# Altium PCB Frontend.PcbDoc
Units mm, origin at the board's own origin, x right, y up, seen from the top; angles counter-clockwise.
Board outline 50 x 80 mm, 4 copper layers (Top Layer, Mid Layer 1, Mid Layer 2, Bottom Layer), stack 1.57 mm thick; 81 components, 52 nets, 250 pads, 306 vias.
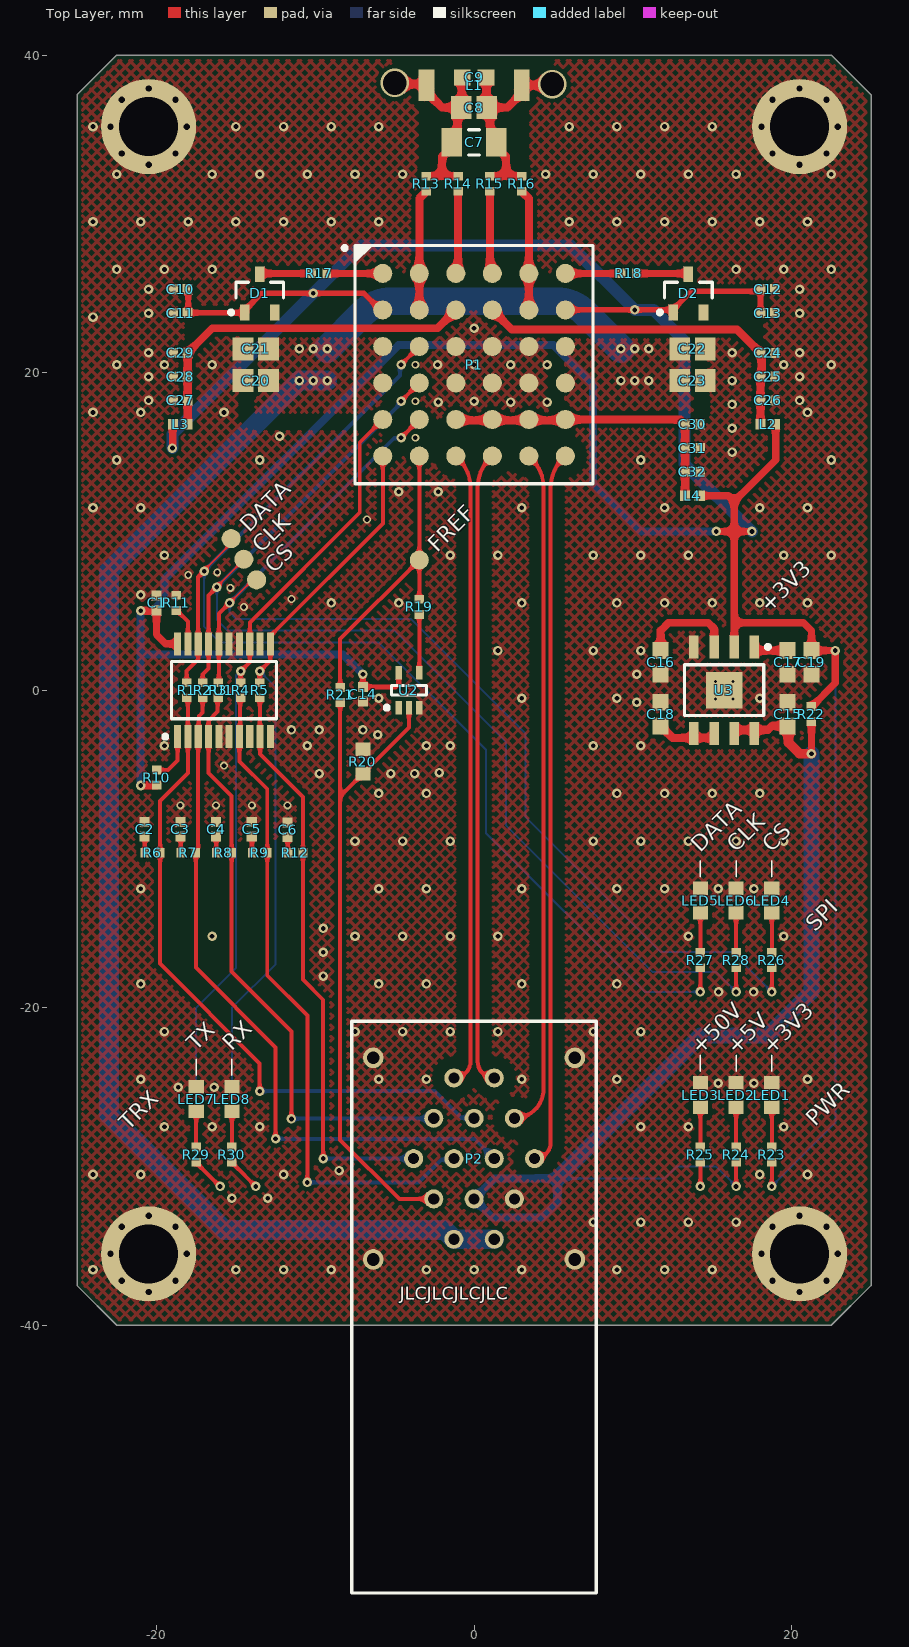
[diagram p0: Top Layer view]
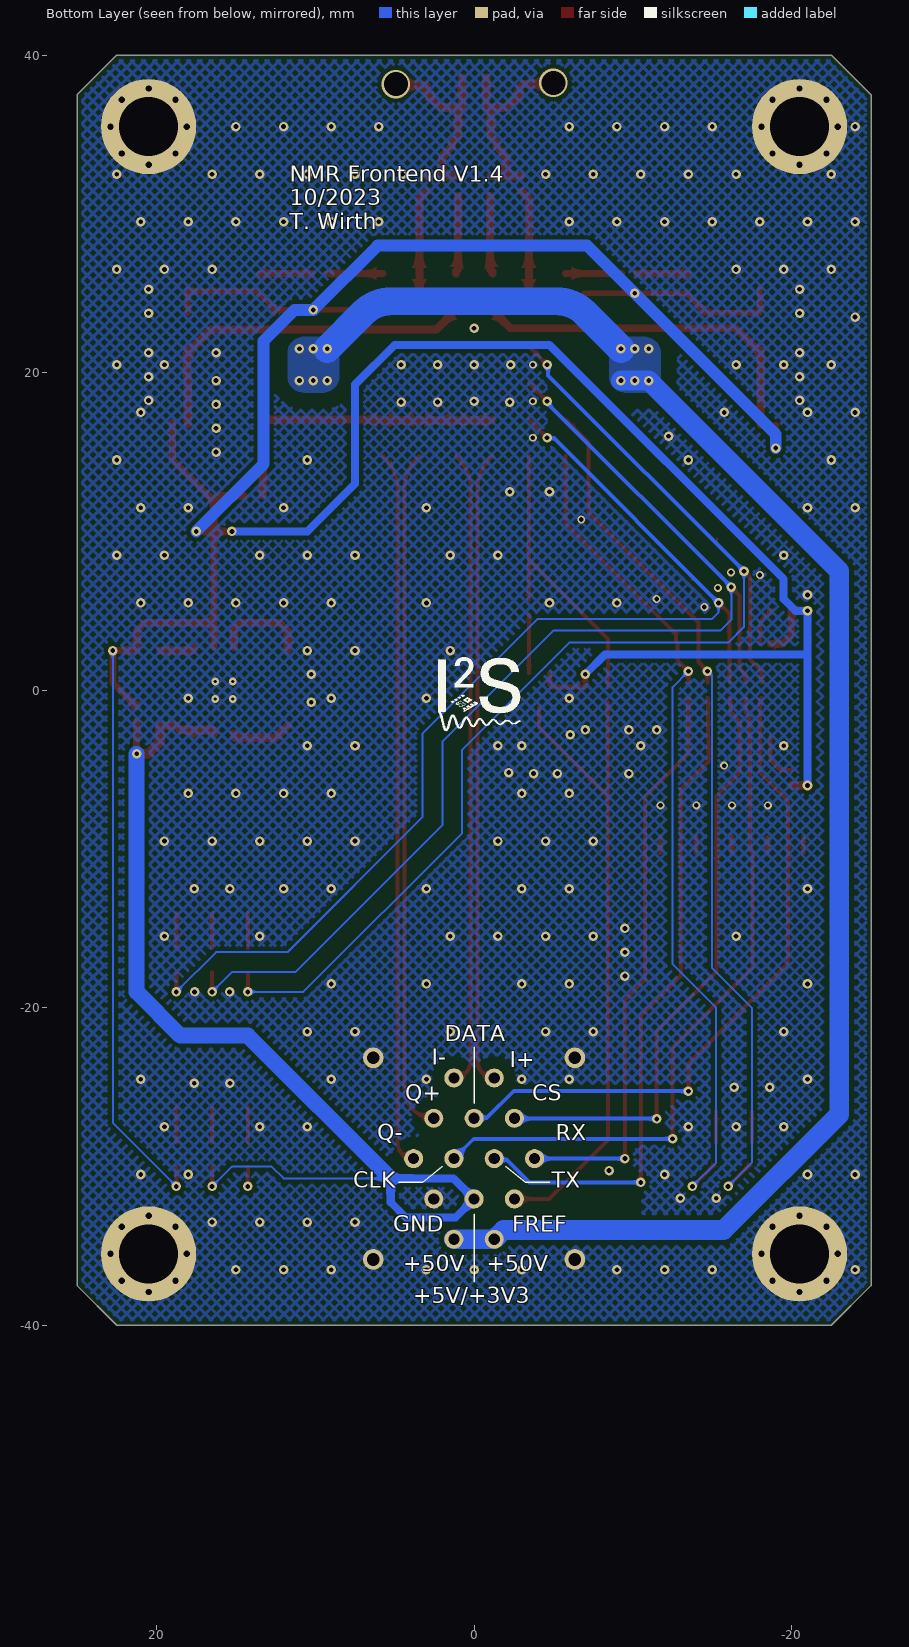
[diagram p1: Bottom Layer view, seen from below]
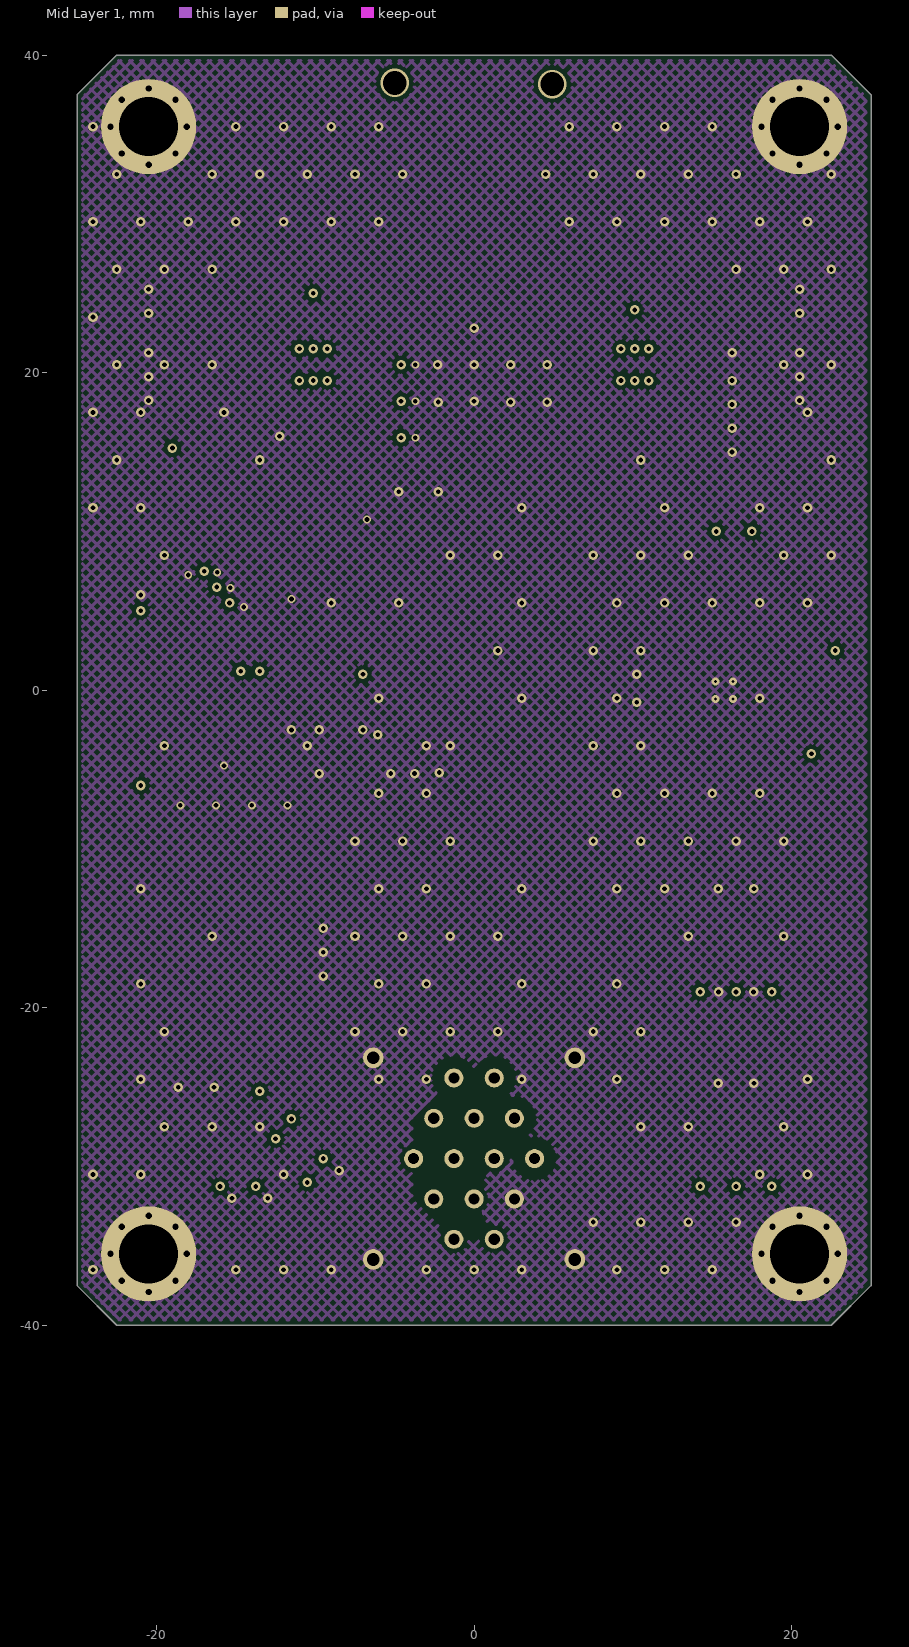
[diagram p2: Mid Layer 1]
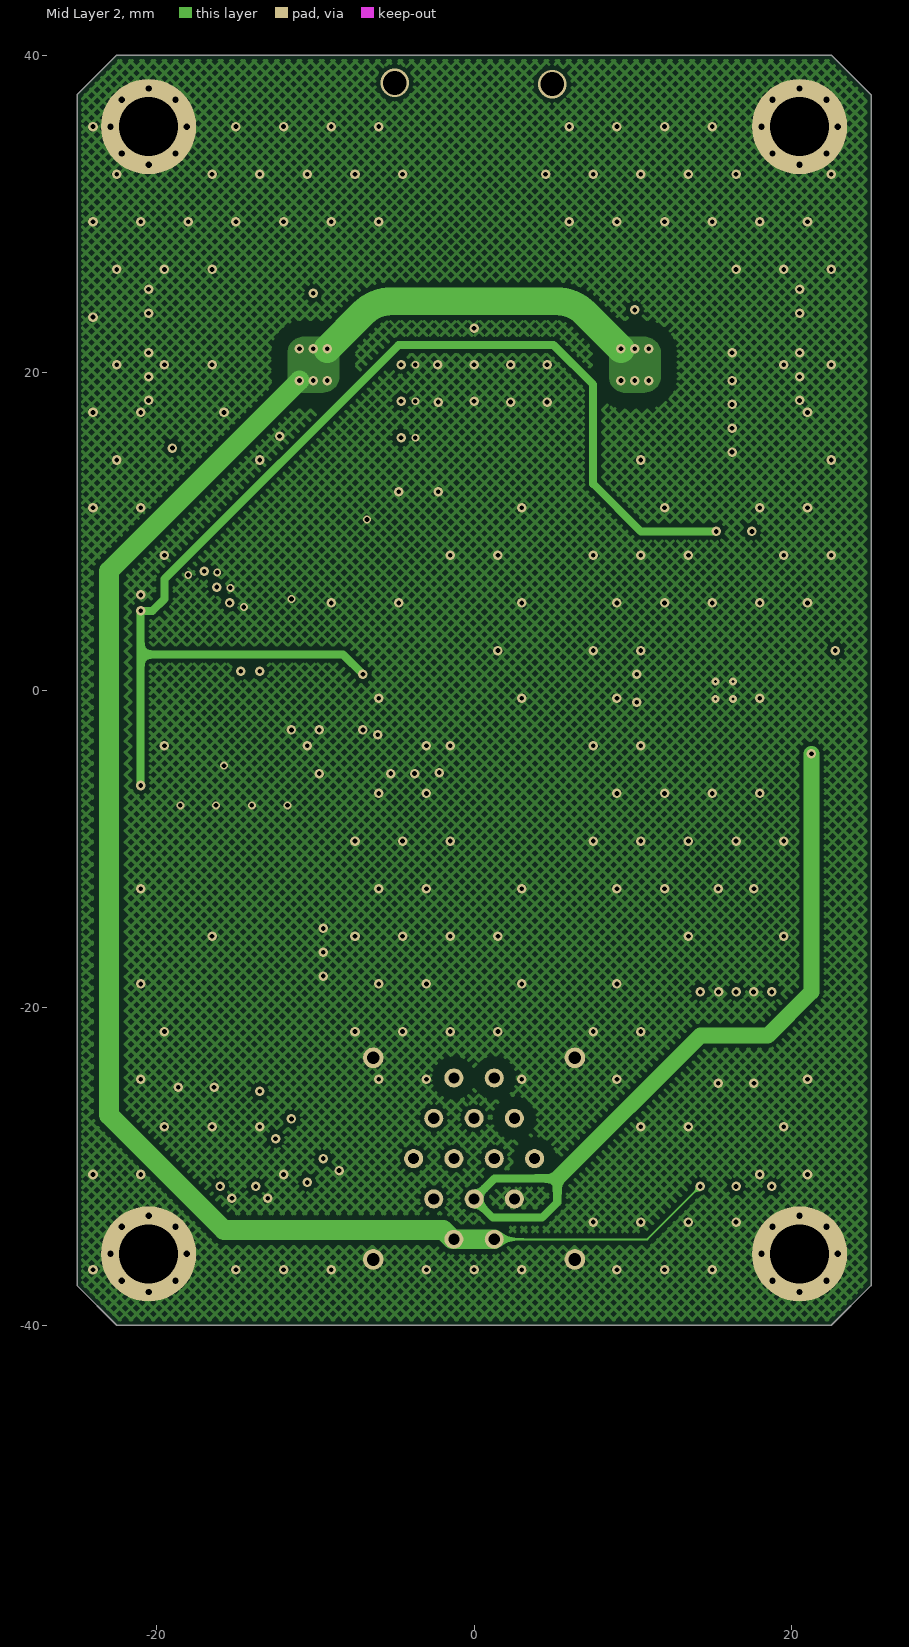
[diagram p3: Mid Layer 2]

## Layer stack, top to bottom
Top Solder: solder mask 0.0127, Solder Resist, Dk 3.8
Top Layer: signal copper 0.035
Dielectric 1: prepreg 0.1, 2313, Dk 4.05
Mid Layer 1: signal copper 0.0175
Core: core 1.265, FR-4, Dk 4.5
Mid Layer 2: signal copper 0.0175
Dielectric 2: prepreg 0.1, 2313, Dk 4.05
Bottom Layer: signal copper 0.035
Bottom Solder: solder mask 0.0127, Solder Resist, Dk 3.8

## Board outline
-25,-37.5 -22.5,-40 22.5,-40 25,-37.5 25,37.5 22.5,40 -22.5,40 -25,37.5

## Design rules (kind name [scope] priority, off if disabled: settings)
BoardOutlineClearance [All] p1: gap=0.2 ignorepadtopadclearanceinfootprint=FALSE
Clearance Clearance_IQ [InNetClass('IQ')] p1: gap=0.102 ignorepadtopadclearanceinfootprint=FALSE except(0.09: Arc-Arc Arc-Track Track-Track; 0.127: SMDPad-SMDPad THPad-Via Via-Fill Via-Region Via-Text; 0.2: Arc-SMDPad Track-SMDPad; 0.254: Arc-Via Arc-Hole Track-Via Track-Hole SMDPad-Via SMDPad-Hole THPad-Hole Via-Via Via-Hole Fill-Hole Poly-Hole Region-Hole Text-Hole; 0.33: Arc-THPad Track-THPad SMDPad-THPad THPad-THPad; 0.75: Arc-Poly Track-Poly SMDPad-Poly THPad-Poly Via-Poly Fill-Poly Poly-Poly)
Clearance Clearance_PWR [InNet('+50V')] p2: gap=0.102 ignorepadtopadclearanceinfootprint=FALSE except(0.09: Arc-Arc Arc-Track Track-Track; 0.127: SMDPad-SMDPad THPad-Via Via-Fill Via-Region Via-Text; 0.2: Arc-SMDPad Track-SMDPad; 0.25: SMDPad-Poly THPad-Poly Via-Poly; 0.254: Arc-Via Arc-Hole Track-Via Track-Hole SMDPad-Via SMDPad-Hole THPad-Hole Via-Via Via-Hole Fill-Hole Poly-Hole Region-Hole Text-Hole; 0.3: Arc-Poly Track-Poly; 0.33: Arc-THPad Track-THPad SMDPad-THPad THPad-THPad; 1: Fill-Poly Poly-Poly)
Clearance [All] p3: gap=0.102 ignorepadtopadclearanceinfootprint=FALSE except(0.09: Arc-Arc Arc-Track Track-Track; 0.127: SMDPad-SMDPad THPad-Via Via-Fill Via-Region Via-Text; 0.2: Arc-SMDPad Track-SMDPad; 0.25: Arc-Poly Track-Poly SMDPad-Poly THPad-Poly Via-Poly Fill-Poly Poly-Poly; 0.254: Arc-Via Arc-Hole Track-Via Track-Hole SMDPad-Via SMDPad-Hole THPad-Hole Via-Via Via-Hole Fill-Hole Poly-Hole Region-Hole Text-Hole; 0.33: Arc-THPad Track-THPad SMDPad-THPad THPad-THPad)
ComponentClearance ComponentClearance_BT0OHM [InComponent('U1') vs (InComponent('R1') OR InComponent('R2') OR InComponent('R3') OR InComponent('R4') OR InComponent('R5'))] p1: gap=-100 collisioncheckmode=3 verticalgap=-100 showdistances=FALSE
ComponentClearance [All] p2: gap=0.102 collisioncheckmode=3 verticalgap=0.102 showdistances=TRUE
DiffPairsRouting [InDifferentialPairClass('IQ')] p1: maxlimit=2 minlimit=0.09 mostfreqgap=0.2 toplayer_minwidth=0.09 toplayer_maxwidth=6 toplayer_prefwidth=0.2 midlayer1_minwidth=0.09 midlayer1_maxwidth=6 midlayer1_prefwidth=0.2 midlayer2_minwidth=0.09 midlayer2_maxwidth=6 midlayer2_prefwidth=0.2 bottomlayer_minwidth=0.09 bottomlayer_maxwidth=6 bottomlayer_prefwidth=0.2 maxuncoupledlength=12.7
Height [All] p1: minheight=0 maxheight=1816.048 prefheight=12.7
HoleSize [All] p1: absolutevalues=TRUE maxlimit=6.3 minlimit=0.2 maxpercent=80.000 minpercent=20.000
HoleToHoleClearance [All] p1: gap=0.5 allowstackedmicrovias=FALSE
MinimumAnnularRing [All] p1: minimumring=0.13
MinimumSolderMaskSliver [All] p1: minsoldermaskwidth=0.13
PasteMaskExpansion [All] p1: expansion=0 percent=-10.000000
PlaneClearance [All] p1: clearance=0.102
PlaneConnect PlaneConnectPowerPads [InPadClass('PowerPads')] p1: planeconnectstyle=Direct reliefexpansion=0.508 reliefentries=4 reliefconductorwidth=0.254 reliefairgap=0.254
PlaneConnect [All] p2: pad.planeconnectstyle=Relief pad.reliefexpansion=0.3 pad.reliefentries=4 pad.reliefconductorwidth=0.102 pad.reliefairgap=0.102 via.planeconnectstyle=Direct via.reliefexpansion=0.3 via.reliefentries=4 via.reliefconductorwidth=0.127 via.reliefairgap=0.127
PolygonConnect PolygonConnectPowerPads [All vs (InPadClass('PowerPads'))] p1: connectstyle=Direct reliefconductorwidth=0.254 reliefentries=4 polygonreliefangle="90 Angle" airgapwidth=0.254
PolygonConnect [All] p2: connectstyle=Direct reliefconductorwidth=0.102 reliefentries=4 polygonreliefangle="90 Angle" airgapwidth=0.102
RoomDefinition Frontend [InComponentClass('Frontend')] p1: confinementstyle=ConfineIn formatcopy=TRUE lockcomponents=FALSE outline -21.5,-57.25 19.75,-57.25 19.75,39.25 -21.5,39.25
RoutingVias [All] p1: holewidth=0.3 width=0.45 viastyle="Through Hole" minholewidth=0.15 minwidth=0.25 maxholewidth=6.3 maxwidth=6.55
SilkToSilkClearance [All] p1: silktosilkclearance=0.15
SilkToSolderMaskClearance [IsPad] p1: minsilkscreentomaskgap=0.15 clearancetoexposedcopper=TRUE
SolderMaskExpansion SolderMaskExpansion_VIA [IsVia] p1: expansion=0 istentingtop=TRUE
SolderMaskExpansion [All] p2: expansion=0 istentingtop=FALSE
Width [All] p1: maxlimit=1816.048 minlimit=0.09 preferedwidth=0.102
19 further rules are at their usual default settings.

## Classes and differential pairs
component class "Status LEDs": LED1 LED2 LED3 LED4 LED5 LED6 LED7 LED8 R2 R4 R11 R13 R22 R28 R30
differential pair class IQ: I Q
net class IQ: I_N I_P Q_N Q_P
component class Power: C2 C3 C5 C16 C18 C20 C22 C24 C26 C30 C32 L2 L3 L4 R22 U3
component class Frontend: C14 C16 C18 C20 C22 C24 D1 D2 L1 P1 P2 R4 R6 R7 R8 R9 R10 R11 R13 R15 R17 R18 R28 R30 U1 U2
differential pair Q: +Q_P -Q_N
differential pair I: +I_P -I_N

## Components (designator, comment, footprint, x,y, rotation, side; value= is the part's Value field where it differs from the comment)
C1 "100n" CAP_0402 -20,5.5 r90 top
C2 "604p" CAP_0402 -20.75,-8.75 r90 top
C3 "604p" CAP_0402 -18.5,-8.75 r90 top
C4 "604p" CAP_0402 -16.25,-8.75 r90 top
C5 "604p" CAP_0402 -14,-8.75 r90 top
C6 "604p" CAP_0402 -11.75,-8.79 r90 top
C7 "tune" CAP_1206 0,34.5 r0 top
C8 "tune" CAP_0805 0,36.7 r0 top
C9 "tune" CAP_0603 0,38.6 r0 top
C10 "100n" CAP_0402 -18.5,25.25 r180 top
C11 "100p" CAP_0402 -18.5,23.75 r180 top
C12 "100n" CAP_0402 18.5,25.25 r0 top
C13 "100p" CAP_0402 18.5,23.75 r0 top
C14 "100n" CAP_0402 -7,-0.25 r270 top
C15 "10u" CAP_0603 19.75,-1.5 r90 top
C16 "22u / 10u" CAP_0603 11.75,1.75 r270 top
C17 "10u" CAP_0603 19.75,1.75 r270 top
C18 "10u" CAP_0603 11.75,-1.5 r90 top
C19 "10u" CAP_0603 21.25,1.75 r270 top
C20 "10u" CAP_0805 -13.75,19.5 r180 top
C21 "10u" CAP_0805 -13.75,21.5 r180 top
C22 "10u" CAP_0805 13.75,21.5 r0 top
C23 "10u" CAP_0805 13.75,19.5 r0 top
C24 "1u" CAP_0402 18.5,21.25 r0 top
C25 "100n" CAP_0402 18.5,19.75 r0 top
C26 "100p" CAP_0402 18.5,18.25 r0 top
C27 "1u" CAP_0402 -18.5,18.25 r180 top
C28 "100n" CAP_0402 -18.5,19.75 r180 top
C29 "100p" CAP_0402 -18.5,21.25 r180 top
C30 "1u" CAP_0402 13.75,16.75 r0 top
C31 "100n" CAP_0402 13.75,15.25 r0 top
C32 "100p" CAP_0402 13.75,13.75 r0 top
D1 "BAR66E6327HTSA1" SOT23 -13.5,25 r90 top
D2 "BAR66E6327HTSA1" SOT23 13.5,25 r90 top
L1 "NMR" NMR-Coil-Pads 0,38.1 r0 top
L2 "1k" CAP_0402 18.5,16.75 r180 top
L3 "1k" CAP_0402 -18.5,16.75 r0 top
L4 "1k" CAP_0402 13.75,12.25 r180 top
LED1 "Green" RES_0603 18.75,-25.5 r90 top
LED2 "Green" RES_0603 16.5,-25.5 r90 top
LED3 "Green" RES_0603 14.25,-25.5 r90 top
LED4 "Yellow" RES_0603 18.75,-13.25 r90 top
LED5 "Yellow" RES_0603 14.25,-13.25 r90 top
LED6 "Yellow" RES_0603 16.5,-13.25 r90 top
LED7 "Red" RES_0603 -17.5,-25.75 r90 top
LED8 "Red" RES_0603 -15.25,-25.75 r90 top
P1 "6 by 6 BGA" "BGA36C230P6X6_1500X1500X190 - Interposer" 0,20.5 r0 top
P2 "EPG.1B.314.NLN" EPG.1B.314.NLN 0,-29.5 r270 top
R1 "0 | inf" RES_0402 -18.1,0 r90 top value="0 [] inf"
R2 "0 | inf" RES_0402 -17.1,0 r90 top value="0 [] inf"
R3 "0 | inf" RES_0402 -16.1,0 r90 top value="0 [] inf"
R4 "0 | inf" RES_0402 -14.7,0 r90 top value="0 [] inf"
R5 "0 | inf" RES_0402 -13.5,0 r90 top value="0 [] inf"
R6 "49R9" RES_0402 -20.25,-10.25 r0 top
R7 "49R9" RES_0402 -18,-10.25 r0 top
R8 "49R9" RES_0402 -15.75,-10.25 r0 top
R9 "49R9" RES_0402 -13.5,-10.25 r0 top
R10 "10k" RES_0402 -20,-5.5 r90 top
R11 "10k" RES_0402 -18.75,5.5 r90 top
R12 "49R9" RES_0402 -11.25,-10.25 r0 top
R13 "0 | inf" RES_0402 -3,31.9 r270 top value="0 [] inf"
R14 "0 | inf" RES_0402 -1,31.9 r270 top value="0 [] inf"
R15 "0 | inf" RES_0402 1,31.9 r270 top value="0 [] inf"
R16 "0 | inf" RES_0402 3,31.9 r270 top value="0 [] inf"
R17 "" RES_0402 -9.75,26.25 r180 top value="0 [] inf"
R18 "" RES_0402 9.75,26.25 r0 top value="0 [] inf"
R19 "10k" RES_0402 -3.45,5.25 r90 top
R20 "69R9" RES_0603 -7,-4.5 r270 top
R21 "" RES_0402 -8.43,-0.3 r270 top value="0 [] inf"
R22 "0 | inf" RES_0402 21.25,-1.5 r90 top value="0 [] inf"
R23 "1k1" RES_0402 18.75,-29.25 r270 top
R24 "2k8" RES_0402 16.5,-29.25 r270 top
R25 "47k" RES_0402 14.25,-29.25 r270 top
R26 "1k3" RES_0402 18.75,-17 r270 top
R27 "1k3" RES_0402 14.25,-17 r270 top
R28 "1k3" RES_0402 16.5,-17 r270 top
R29 "1k62" RES_0402 -17.5,-29.25 r270 top
R30 "1k62" RES_0402 -15.25,-29.25 r270 top
U1 "BusTransceiver" TSSOP-20 -15.75,0 r90 top
U2 "NC7SV04P5X" SOT23-65P210X110-5N -4.1,0 r90 top
U3 "ADM7154ARDZ-3.3-R7" SOIC-8_TP 15.75,0 r270 top

## Footprints (in the part's own frame and the unit in brackets; to place one, negate y for a bottom-side part, rotate by r counter-clockwise, add the part's x,y. Pads: shape width x height; smd on the part's side, far side on the other; paste and mask are expansions set on the pad)
"BGA36C230P6X6_1500X1500X190 - Interposer" [mm] "BGA, 36-Leads, Body 15,00x15,00mmx1,90mm, Pitch 2,30mm"
  round 1.2 smd: A1(-5.75,5.75) A2(-3.45,5.75) A3(-1.15,5.75) A4(1.15,5.75) A5(3.45,5.75) A6(5.75,5.75) B1(-5.75,3.45) B2(-3.45,3.45) B3(-1.15,3.45) B4(1.15,3.45) B5(3.45,3.45) B6(5.75,3.45) C1(-5.75,1.15) C2(-3.45,1.15) C3(-1.15,1.15) C4(1.15,1.15) C5(3.45,1.15) C6(5.75,1.15) D1(-5.75,-1.15) D2(-3.45,-1.15) D3(-1.15,-1.15) D4(1.15,-1.15) D5(3.45,-1.15) D6(5.75,-1.15) E1(-5.75,-3.45) E2(-3.45,-3.45) E3(-1.15,-3.45) E4(1.15,-3.45) E5(3.45,-3.45) E6(5.75,-3.45) F1(-5.75,-5.75) F2(-3.45,-5.75) F3(-1.15,-5.75) F4(1.15,-5.75) F5(3.45,-5.75) F6(5.75,-5.75)
  silkscreen extent -8.27,-7.5 7.5,7.5, body extent -7.5,-7.5 7.5,7.5, height 1.9
CAP_0402 [mm] "Chip Capacitor, 2-Leads, Body 1,00x0,50mm, IPC Medium Density"
  rect 0.64x0.64 smd: 1(-0.46,0) 2(0.46,0)
  body extent -0.55,-0.3 0.55,0.3, height 0.6
CAP_0603 [mm] "Chip Capacitor, 2-Leads, Body 1,60x0,80mm, IPC Medium Density"
  rect 1.05x1 smd: 1(-0.75,0) 2(0.75,0)
  body extent -0.87,-0.48 0.87,0.48, height 0.85
CAP_0805 [mm] "Chip Capacitor, 2-Leads, Body 2,00x1,25mm, IPC Medium Density"
  rect 1.3x1.45 smd: 1(-0.8,0) 2(0.8,0)
  body extent -1.1,-0.72 1.1,0.72, height 1.1
CAP_1206 [mm] "Chip Capacitor, 2-Leads, Body 3,20x1,60mm, IPC Medium Density"
  rect 1.3x1.8 smd: 1(-1.4,0) 2(1.4,0)
  silkscreen extent -0.35,-0.8 0.35,0.8, body extent -1.7,-0.9 1.7,0.9, height 1.5
EPG.1B.314.NLN [mil]
  round 47.24 hole 27.56: 1(-200,-50) 2(-100,-100) 3(0,-150) 4(100,-100) 5(200,-50) 6(200,50) 7(100,100) 8(0,150) 9(-100,100) 10(-200,50) 11(-100,0) 12(0,-50) 13(100,0) 14(0,50)
  round 51.18 hole 31.5: 15(-250,-250) 16(250,-250) 17(250,250) 18(-250,250)
  silkscreen extent -341,-303 1077,303, body extent -343,-303 1075,303, height 554
NMR-Coil-Pads [mm] "Pads to solder an NMR coil"
  rect 1x2 smd: 1(-3,0) 2(3,0)
RES_0402 [mm] "Chip Resistor, 2-Leads, Body 1,05x0,54mm, IPC Medium Density"
  rect 0.55x0.6 smd: 1(-0.475,0) 2(0.475,0)
  body extent -0.55,-0.3 0.55,0.3, height 0.4
RES_0603 [mm] "Chip Resistor, 2-Leads, Body 1,60x0,83mm, IPC Medium Density"
  rect 0.85x0.95 smd: 1(-0.775,0) 2(0.775,0)
  body extent -0.85,-0.48 0.85,0.48, height 0.6
SOIC-8_TP [mm] "SOIC, 8-Leads, Body 4,90x3,90mm, Pitch 1,27mm, Thermal Pad 2,30x2,30mm, IPC Medium Density"
  rect 2.3x2.3 smd: 0(0,0)
  rect 1.45x0.6 smd: 1(-2.725,1.905) 2(-2.725,0.635) 3(-2.725,-0.635) 4(-2.725,-1.905) 5(2.725,-1.905) 6(2.725,-0.635) 7(2.725,0.635) 8(2.725,1.905)
  silkscreen extent -2.85,-2.5 1.6,2.88, body extent -3,-2.5 3,2.5, height 1.75
SOT23 [mm] "SOT23, 3-Leads, Body 2,90x2,45mm, Pitch 0,95mm, IPC Medium Density"
  rect 1x0.6 smd: 1(-1.2,0.95) 2(-1.2,-0.95) 3(1.2,0)
  silkscreen extent -1.32,-1.5 0.7,1.92, body extent -1.3,-1.5 1.3,1.5, height 1.1
SOT23-65P210X110-5N [mm] "SOT23, 5-Leads, Body 2,00x2,10mm, Pitch 0,65mm, IPC Medium Density"
  rect 0.85x0.4 smd: 1(-1.1,0.65) 2(-1.1,0) 3(-1.1,-0.65) 4(1.1,-0.65) 5(1.1,0.65)
  silkscreen extent -1.22,-1.1 0.3,1.52, body extent -1.15,-1.1 1.15,1.1, height 1.1
TSSOP-20 [mm] "TSOP, 20-Leads, Body 6,50x4,35mm, Pitch 0,65mm, IPC Medium Density"
  rect 1.45x0.45 smd: 1(-2.925,2.925) 2(-2.925,2.275) 3(-2.925,1.625) 4(-2.925,0.975) 5(-2.925,0.325) 6(-2.925,-0.325) 7(-2.925,-0.975) 8(-2.925,-1.625) 9(-2.925,-2.275) 10(-2.925,-2.925) 11(2.925,-2.925) 12(2.925,-2.275) 13(2.925,-1.625) 14(2.925,-0.975) 15(2.925,-0.325) 16(2.925,0.325) 17(2.925,0.975) 18(2.925,1.625) 19(2.925,2.275) 20(2.925,2.925)
  silkscreen extent -3.05,-3.3 1.8,3.82, body extent -3.2,-3.3 3.2,3.3, height 1.2

## Part data
C1 C2 C3 C4 C5 C6 C7 C8 C9 C10 C11 C12 C13 C14 C15 C16 C17 C18 C19 C20 C21 C22 C23 C24 C25 C26 C27 C28 C29 C30 C31 C32: library part Cap
D1 D2: library part Diode_series, "SMP1320-075LF (SC-70) / BAV99 (SOT23)"
L1: library part Ind
L2 L3 L4: library part FerriteBead
LED1 LED2 LED3 LED4 LED5 LED6 LED7 LED8: library part LED
P1: library part BGA_6x6
P2: "LEMO Connector - 14 pin EPG.1B.314.NLN Elbow receptacle for printed circuit (solder mount), Female Contact Drawing Rev. 00 Source: http://www.lemo.com/catalog/ROW/UK_English/unipole_multipole.pdf"
R1 R2 R3 R4 R5 R6 R7 R8 R9 R10 R11 R12 R13 R14 R15 R16 R17 R18 R19 R20 R21 R22 R23 R24 R25 R26 R27 R28 R29 R30: library part Res
U1: library part 74LVC245A
U3: library part ADM715X

## Free pads (board coordinates)
  round 6 hole 3.7 mask+0.102: 0(-20.5,-35.5) 0(-20.5,35.5) 0(20.5,-35.5) 0(20.5,35.5)
  round 1.2 smd paste-0.6: 1(-15.3,9.55) 2(-14.5,8.25) 3(-13.7,6.95) 3(-3.45,8.2)

## Via types
v1: diameter 0.6, hole 0.3, Top Layer to Bottom Layer, tented both sides, 254 vias
v2: diameter 0.8, hole 0.4, Top Layer to Bottom Layer, tented both sides, 32 vias
v3: diameter 0.5, hole 0.3, Top Layer to Bottom Layer, tented both sides, 14 vias
v4: diameter 0.5, hole 0.2, Top Layer to Bottom Layer, tented both sides, 4 vias
v5: diameter 1.8, hole 1.5, Top Layer to Bottom Layer, tented both sides, 2 vias

## Nets (pads, with @x,y where several pads share a name; then routed paths per layer and width w, separated by ;. In a path a pad name is that pad's centre, name@x,y a point inside that pad or via, vN(x,y) a via of type N, cw(c..) or ccw(c..) an arc to the next point about the centre after c; other vN are vias at no path point)
+3V3: C1.1 C10.1 C11.1 C12.1 C13.1 C14.1 C19.1 D1.1 D2.1 L2.1 L3.1 L4.1 P1.B1 P1.B6 R10.1 R22.2 R23.2 U1.20 U2.5 U3.2 | length 317.9
  Top Layer w0.25: v1(18.75,-31.25) 18.75,-30.025
  Top Layer w0.3: v1(-7,1) C14.1 -4.926,0.21 -4.75,0.386 U2.5
  Top Layer w0.35: C10.1@-18,25.32 -18,23.775 -14.475,23.775 D1.1 -14.45,24 -14.325,24.125 -14.255,24.125 -13.38,25 v1(-10.125,25) -6.941,25 -5.891,23.95 P1.B1 ; P1.B6 v1(10.125,23.95) 12.425,23.95 D2.1@12.55,23.825 ; D2.1 D2.1@12.55,23.825 ; C13.1 C12.1@18.04,25.105 ; C12.1 17.91,25.12 13.67,25.12 12.55,24 D2.1@12.55,23.825
  Top Layer w0.45: C1.1 -20,3.5 -19.425,2.925 U1.20 ; v1(-19,15.25) -18.98,15.27 -18.98,16.659 L3.1@-19,16.679 ; L4.1@14.5,12.25 16.025,12.25 16.385,11.89 ; v1(15.25,10) 16.385,10 ; U3.2 16.385,4.25 ; v1(17.5,10) 16.385,10 ; L2.1@19,16.845 19,14.505 16.385,11.89 ; R22.2 21.275,-1.025 22.75,0.45 v1(22.75,2.5) ; v1(22.75,2.5) C19.1 21.25,3.75 20.75,4.25 16.385,4.25 ; 16.385,4.25 16.385,10 ; 16.385,10 16.385,11.89
  Top Layer w0.5: v1(-21,-6) -20.987,-5.987 -20.012,-5.987 R10.1 ; v1(-21,5) -20.981,5.019 -20.021,5.019 C1.1
  Mid Layer 2 w0.5: v1(-21,-6) -21,2.25 ; v1(-7,1) -8.25,2.25 -21,2.25 ; v1@15.223,10 10.5,10 7.5,13 7.5,19.25 5,21.75 -4.75,21.75 -19.5,7 -19.5,5.75 -20.25,5 v1(-21,5) -21,2.25
  Bottom Layer w0.125: v1(18.75,-31.25) 22.75,-27.25 v1(22.75,2.5)
  Bottom Layer w0.5: v1(-21,-6) v1(-21,5) -20.25,5 -19.5,5.75 -19.5,7 -4.75,21.75 5,21.75 7.5,19.25 7.5,13 10.5,10 v1@15.223,10 ; -21,2.25 -8.25,2.25 v1(-7,1)
  Bottom Layer w0.75: v1(-19,15.25) -19,16.125 v1@-10.154,24.971 ; v1(-10.125,25) -7.125,28 6.075,28 v1(10.125,23.95) 11.3,23.95 13.25,22 13.25,14.25 v1(17.5,10)
+3V3_IC: C30.1 C31.1 C32.1 L4.2 P1.E3 P1.E4 P1.E5 P1.E6 | length 19.2
  Top Layer w0.5: P1.E3 -1.1,17 1.1,17 P1.E4 1.2,17 3.4,17 P1.E5 3.5,17 5.7,17 P1.E6 12.99,17.05 C30.1 C31.1 L4.2
+5V: C15.1 P2.13 R22.1 R24.2 U3.7 U3.8 | length 126.4
  Top Layer w0.25: v1(16.5,-31.25) 16.5,-30.025
  Top Layer w0.45: v1(21.25,-4) R22.1
  Top Layer w0.5: U3.7 16.385,-2.55 16.435,-2.5 17.605,-2.5 U3.8@17.655,-2.55 ; U3.8 U3.8@17.655,-2.55 ; C15.1 18.75,-2.25 18.5,-2.5 17.705,-2.5 U3.8@17.655,-2.55
  Top Layer w0.61: C15.1 19.799,-2.299 19.799,-3.299 20.5,-4 v1(21.25,-4)
  Mid Layer 2 w0.5: P2.13 1.29,-30.75 5.25,-30.75 5.25,-32.25 4.28,-33.22 1.18,-33.22 P2.13
  Mid Layer 2 w1: 5.25,-30.75 14.25,-21.75 18.5,-21.75 21.25,-19 v1(21.25,-4)
  Bottom Layer w0.125: P2.13 1.29,-30.75 12,-30.75 12.75,-30 15.25,-30 v1(16.5,-31.25)
  Bottom Layer w0.5: P2.13 1.29,-30.75 5.25,-30.75 5.25,-32.25 4.28,-33.22 1.18,-33.22 P2.13
  Bottom Layer w1: 5.25,-30.75 14.25,-21.75 18.5,-21.75 21.25,-19 v1(21.25,-4)
+50V: C20.1 C21.1 C22.1 C23.1 P1.C1 P1.C6 P1.D1 P1.D6 P2.5 P2.6 R25.2 | length 216.4
  Top Layer w0.25: v1(14.25,-31.25) 14.25,-30.025
  Mid Layer 2 w0.125: P2.6 10.92,-34.58 v1(14.25,-31.25) v1@14.156,-31.25
  Mid Layer 2 w1.25: v1(-11,19.5) -23,7.5 -23,-26.75 -15.75,-34 -1.944,-34 -1.364,-34.58 P2.5 P2.6
  Mid Layer 2 w1.75: v1(-9.25,21.5) -6.994,23.756 cw(c-5.198,21.96) -5.198,24.5 5.198,24.5 cw(c5.198,21.96) 6.994,23.756 v1(9.25,21.5)
  Bottom Layer w1.25: v1(-9.25,19.5) v1(-10.125,19.5) v1(-11,19.5) -23,7.5 -23,-26.714 -15.714,-34 -1.85,-34 P2.5 P2.6
  Bottom Layer w1.75: v1(-9.25,21.5) -6.994,23.756 cw(c-5.198,21.96) -5.198,24.5 5.198,24.5 cw(c5.198,21.96) 6.994,23.756 v1(9.25,21.5)
  other v1: 9.25,19.5 10.125,19.5 11,19.5 -11,21.5 -10.125,21.5 10.125,21.5 11,21.5
Coil_N: C7.2 C8.2 C9.2 L1.2 R15.1 R16.1 | length 13.7
  Top Layer w0.5: C8.2@0.75,36.7 0.75,36.95 0.8,37 0.775,37.025 0.775,38.575 C9.2 ; R15.1 2.025,32.375 ; R16.1 2.025,32.375 ; v5@4.85,38.1 L1.2 3,37.6 2.1,36.7 C8.2 1,36.5 1,34.9 C7.2 1.4,34.25 2.025,33.625 2.025,32.375
  other v5: 4.925,38.175
Coil_P: C7.1 C8.1 C9.1 L1.1 R13.1 R14.1 | length 13.6
  Top Layer w0.5: v5(-5,38.25) -4.925,38.175 -3.075,38.175 L1.1 -2.875,37.975 -2.875,37.475 -2.75,37.35 -2.666,37.35 -2.016,36.7 C8.1 ; R13.1 -2.025,32.375 ; R14.1@-1.039,32.375 -2.025,32.375 ; C8.1@-0.797,36.697 -1.047,36.447 -1.047,34.853 C7.1 -1.4,34.25 -2.025,33.625 -2.025,32.375 ; C8.1@-0.775,37.175 -0.775,38.575 C9.1 ; C8.1@-0.75,36.7 C8.1@-0.75,36.95
FREF: P2.4 R20.2 R21.2 U2.2 | length 42.3
  Top Layer w0.25: R21.2 -8.43,-6.68 ; U2.2 -4.1,-2.35 -7.025,-5.275 -8.43,-6.68 ; P2.4 -4.71,-32.04 -8.43,-28.32 -8.43,-6.68
FREF_BUFF: P1.F2 pad.3@-3.45,8.2 R19.2 R21.1 | length 19.1
  Top Layer w0.25: R21.1 -8.43,3.22 pad.3@-3.45,8.2 ; R19.2 pad.3@-3.45,8.2 ; P1.F2 pad.3@-3.45,8.2
GND: C1.2 C2.2 C3.2 C4.2 C5.2 C6.2 C10.2 C11.2 C12.2 C13.2 C14.2 C15.2 C16.2 C17.2 C18.2 C19.2 C20.2 C21.2 C22.2 C23.2 C24.2 C25.2 C26.2 C27.2 C28.2 C29.2 C30.2 C31.2 C32.2 LED1.2 LED2.2 LED3.2 LED4.2 LED5.2 LED6.2 LED7.2 LED8.2 P1.C3 P1.C4 P1.C5 P1.D3 P1.D4 P1.D5 P2.7 P2.15 P2.16 P2.17 P2.18 pad.0 R11.2 R20.1 U1.5 U1.6 U1.8 U1.10 U1.12 U1.14 U1.15 U2.3 U3.0 U3.4
  other v1: -24,-36.5 -15,-36.5 -12,-36.5 -9,-36.5 -3,-36.5 0,-36.5 3,-36.5 9,-36.5 12,-36.5 15,-36.5 7.5,-33.5 10.5,-33.5 13.5,-33.5 16.5,-33.5 -15.25,-32 -13,-32 -24,-30.5 -21,-30.5 -12,-30.5 18,-30.5 21,-30.5 -8.5,-30.25 -19.5,-27.5 -16.5,-27.5 -13.5,-27.5 10.5,-27.5 13.5,-27.5 19.5,-27.5 -18.625,-25 -16.375,-25 15.375,-24.75 17.625,-24.75 -21,-24.5 -6,-24.5 -3,-24.5 3,-24.5 9,-24.5 21,-24.5 -19.5,-21.5 -7.5,-21.5 -4.5,-21.5 -1.5,-21.5 1.5,-21.5 7.5,-21.5 10.5,-21.5 15.4,-19 17.6,-19 -21,-18.5 -6,-18.5 -3,-18.5 3,-18.5 9,-18.5 -9.5,-18 -9.5,-16.5 -16.5,-15.5 -7.5,-15.5 -4.5,-15.5 -1.5,-15.5 1.5,-15.5 13.5,-15.5 19.5,-15.5 -9.5,-15 -21,-12.5 -6,-12.5 -3,-12.5 3,-12.5 9,-12.5 12,-12.5 15.375,-12.5 17.625,-12.5 -7.5,-9.5 -4.5,-9.5 -1.5,-9.5 7.5,-9.5 10.5,-9.5 13.5,-9.5 16.5,-9.5 19.5,-9.5 -6,-6.5 -3,-6.5 9,-6.5 12,-6.5 15,-6.5 18,-6.5 -9.75,-5.25 -5.25,-5.25 -3.75,-5.25 -2.186,-5.186 -19.5,-3.5 -10.5,-3.5 -3,-3.5 -1.5,-3.5 7.5,-3.5 10.5,-3.5 -6.061,-2.811 -11.5,-2.5 -9.75,-2.5 -7,-2.5 10.25,-0.75 -6,-0.5 3,-0.5 9,-0.5 18,-0.5 10.25,1 1.5,2.5 7.5,2.5 10.5,2.5 -9,5.5 -4.75,5.5 3,5.5 9,5.5 12,5.5 15,5.5 18,5.5 21,5.5 -21,6 -19.5,8.5 -1.5,8.5 1.5,8.5 7.5,8.5 10.5,8.5 13.5,8.5 19.5,8.5 22.5,8.5 -24,11.5 -21,11.5 3,11.5 12,11.5 18,11.5 21,11.5 -4.75,12.5 -2.25,12.5 -22.5,14.5 -13.5,14.5 10.5,14.5 22.5,14.5 16.25,15 -12.25,16 16.25,16.5 -24,17.5 -21,17.5 -15.75,17.5 21,17.5 16.25,18 -2.25,18.15 2.3,18.15 4.6,18.15 0,18.2 -20.5,18.25 20.5,18.25 16.25,19.5 -20.5,19.75 20.5,19.75 -22.5,20.5 -19.5,20.5 -16.5,20.5 -2.3,20.5 0,20.5 2.3,20.5 4.6,20.5 19.5,20.5 22.5,20.5 -20.5,21.25 16.25,21.25 20.5,21.25 0,22.8 -24,23.5 -20.5,23.75 20.5,23.75 -20.5,25.25 20.5,25.25 -22.5,26.5 -19.5,26.5 -16.5,26.5 16.5,26.5 19.5,26.5 22.5,26.5 -24,29.5 -21,29.5 -18,29.5 -15,29.5 -12,29.5 -9,29.5 -6,29.5 6,29.5 9,29.5 12,29.5 15,29.5 18,29.5 21,29.5 -22.5,32.5 -16.5,32.5 -13.5,32.5 -10.5,32.5 -7.5,32.5 -4.5,32.5 4.5,32.5 7.5,32.5 10.5,32.5 13.5,32.5 16.5,32.5 22.5,32.5 -24,35.5 -15,35.5 -12,35.5 -9,35.5 -6,35.5 6,35.5 9,35.5 12,35.5 15,35.5
  other v2: -20.5,-37.9 20.5,-37.9 -22.2,-37.2 -18.8,-37.2 18.8,-37.2 22.2,-37.2 -22.9,-35.5 -18.1,-35.5 18.1,-35.5 22.9,-35.5 -22.2,-33.8 -18.8,-33.8 18.8,-33.8 22.2,-33.8 -20.5,-33.1 20.5,-33.1 -20.5,33.1 20.5,33.1 -22.2,33.8 -18.8,33.8 18.8,33.8 22.2,33.8 -22.9,35.5 -18.1,35.5 18.1,35.5 22.9,35.5 -22.2,37.2 -18.8,37.2 18.8,37.2 22.2,37.2 -20.5,37.9 20.5,37.9
  other v3: -18.5,-7.25 -16.25,-7.25 -14,-7.25 -11.75,-7.25 -15.75,-4.75 -14.5,5.25 -11.5,5.75 -15.35,6.45 -18,7.25 -16.175,7.425 -6.75,10.75 -3.7,15.9 -3.7,18.2 -3.7,20.5
  other v4: 15.2,-0.55 16.3,-0.55 15.2,0.55 16.3,0.55
I_N: P1.F4 P2.10 | length 40
  Top Layer w0.25: P1.F4 0.969,14.569 ccw(c2.765,12.773) 0.225,12.773 0.225,-23.375 ccw(c1.27,-23.375) P2.10
I_P: P1.F3 P2.1 | length 40
  Top Layer w0.25: P2.1 ccw(c-1.27,-23.375) -0.225,-23.375 -0.225,12.773 ccw(c-2.765,12.773) -0.969,14.569 P1.F3
LNA_N: P1.A4 R15.2 | length 4.9
  Top Layer w0.5: 1,31.125 1,26.522 1.15,26.372 P1.A4
LNA_P: P1.A3 R14.2 | length 4.9
  Top Layer w0.5: P1.A3 -1.15,26.372 -1,26.522 -1,31.125
NetC2_1: C2.1 R6.1 | length 1.1
  Top Layer w0.25: C2.1 -20.737,-9.223 -20.737,-10.238 R6.1
NetC3_1: C3.1 R7.1 | length 1.1
  Top Layer w0.2: C3.1 C3.1@-18.475,-9.235
  Top Layer w0.25: R7.1 C3.1@-18.475,-9.235
NetC4_1: C4.1 R8.1 | length 1.1
  Top Layer w0.25: C4.1 -16.237,-9.223 -16.237,-10.238 R8.1
NetC5_1: C5.1 R9.1 | length 1.1
  Top Layer w0.25: C5.1 -13.988,-9.222 -13.988,-10.238 R9.1
NetC6_1: C6.1 R12.1 | length 1
  Top Layer w0.25: C6.1 -11.738,-9.262 -11.738,-10.238 R12.1
NetC16_1: C16.1 U3.3 | length 6.1
  Top Layer w0.5: C16.1 11.75,3.75 12.25,4.25 14.75,4.25 15.115,3.885 U3.3
NetC17_1: C17.1 U3.1 | length 2.3
  Top Layer w0.5: U3.1 17.655,2.55 17.705,2.5 C17.1
NetC18_1: C18.1 U3.5 U3.6 | length 3.9
  Top Layer w0.5: C18.1 12.5,-3 15.065,-3 15.115,-2.95 U3.6
NetD1_3: D1.3 R17.2 | length 3.3
  Top Layer w0.45: D1.3 cw(c-13.379,26.079) -13.379,26.25 R17.2
NetD2_3: D2.3 R18.2 | length 3.3
  Top Layer w0.45: R18.2 13.379,26.25 cw(c13.379,26.079) D2.3
NetLED1_1: LED1.1 R23.1 | length 2.2
  Top Layer w0.25: 18.75,-28.475 LED1.1
NetLED2_1: LED2.1 R24.1 | length 2.2
  Top Layer w0.25: 16.5,-28.475 LED2.1
NetLED3_1: LED3.1 R25.1 | length 2.2
  Top Layer w0.25: 14.25,-28.475 LED3.1
NetLED4_1: LED4.1 R26.1 | length 2.2
  Top Layer w0.25: 18.75,-16.225 LED4.1
NetLED5_1: LED5.1 R27.1 | length 2.2
  Top Layer w0.25: 14.25,-16.225 LED5.1
NetLED6_1: LED6.1 R28.1 | length 2.2
  Top Layer w0.25: 16.5,-16.225 LED6.1
NetLED7_1: LED7.1 R29.1 | length 2
  Top Layer w0.25: -17.5,-28.475 LED7.1
NetLED8_1: LED8.1 R30.1 | length 2
  Top Layer w0.25: -15.25,-28.475 LED8.1
NetR10_2: R10.2 U1.1 | length 3.1
  Top Layer w0.25: R10.2 -19.275,-5.025 -18.675,-4.425 U1.1
NetR11_1: R11.1 U1.19 | length 2.4
  Top Layer w0.25: R11.1 -18.725,5.025 -18.025,4.325 U1.19
NetR19_1: R19.1 U2.4 | length 3.7
  Top Layer w0.25: U2.4 R19.1
Q_N: P1.F6 P2.8 | length 45.1
  Top Layer w0.25: P2.8 ccw(c3.81,-28.485) 4.825,-28.485 4.825,12.773 cw(c7.365,12.773) 5.569,14.569 P1.F6
Q_P: P1.F5 P2.9 | length 43
  Top Layer w0.25: P2.9 ccw(c2.54,-25.125) 4.375,-25.125 4.375,12.773 ccw(c1.835,12.773) 3.631,14.569 P1.F5
RX: P2.3 R5.1 R12.2 U1.9 | length 36.4
  Top Layer w0.25: R5.1 -13.487,-0.488 -13.487,-2.913 U1.9 -13.475,-4.025 -10.775,-6.725 R12.2 -10.775,-18.225 -9.5,-19.5 v1(-9.5,-29.5)
  Bottom Layer w0.25: v1(-9.5,-29.5) P2.3
RX_BUFF: P1.F1 R5.2 R30.2 U1.11 | length 54
  Top Layer w0.25: R30.2@-15.067,-29.933 v1(-13.75,-31.25) ; R5.2 v1(-13.5,1.2) -12.825,1.875 U1.11 -12.725,3.025 -12.725,3.525 -5.75,10.5 P1.F1
  Bottom Layer w0.125: v1(-13.75,-31.25) -15.25,-29.75 -15.25,-20 -12.5,-17.25 -12.5,0.2 v1(-13.5,1.2)
SPI_C\S\: P2.2 R3.1 R8.2 U1.4 | length 37.9
  Top Layer w0.25: R3.1 -16.154,-0.529 -16.154,-1.354 -16.725,-1.925 -16.725,-5.225 -15.275,-6.675 R8.2 -15.275,-17.725 -11.5,-21.5 v1(-11.5,-27)
  Bottom Layer w0.25: v1(-11.5,-27) -11.48,-26.98 -2.56,-26.98 P2.2
SPI_C\S\_BUFF: P1.E2 pad.3@-13.7,6.95 R3.2 R26.2 U1.16 | length 73.3
  Top Layer w0.125: v1(-15.4,5.5) -13.95,6.95 pad.3@-13.7,6.95
  Top Layer w0.25: R3.2 -16.075,0.5 U1.16 -16.075,4.825 v1(-15.4,5.5) ; v1(-4.6,15.9) P1.E2 ; v1(18.75,-19) 18.75,-17.775
  Mid Layer 1 w0.25: v1@-4.627,15.873 v1(-4.6,15.9)
  Bottom Layer w0.125: v1(-15.4,5.5) -15.4,4.9 -15,4.5 -4,4.5 3.25,-2.75 3.25,-8 11.75,-16.5 16.25,-16.5 v1(18.75,-19)
  Bottom Layer w0.25: v1(-15.4,5.5) -5.027,15.873 v1@-4.627,15.873
SPI_CLK: P2.14 R2.1 R7.2 U1.3 | length 44.3
  Top Layer w0.25: R2.1 -17.1,-1.4 -17.337,-1.637 -17.337,-2.887 U1.3 -17.375,-10.1 R7.2 -17.525,-17.475 -12.5,-22.5 v1(-12.5,-28.25)
  Bottom Layer w0.25: v1(-12.5,-28.25) 0.02,-28.25 P2.14
SPI_CLK_BUFF: P1.D2 pad.2 R2.2 R28.2 U1.17 | length 75.7
  Top Layer w0.125: v1(-16.2,6.5) -16.2,6.525 -14.5,8.225 pad.2
  Top Layer w0.25: R2.2 -17.1,1 -16.725,1.375 U1.17 -16.725,5.975 v1(-16.2,6.5) ; v1(-4.6,18.2) P1.D2 ; v1(16.5,-19) 16.5,-17.775
  Mid Layer 1 w0.25: v1@-4.667,18.033 -4.667,18.133 v1(-4.6,18.2)
  Bottom Layer w0.125: v1(-16.2,6.5) -16.2,4.45 -15.5,3.75 -5,3.75 2,-3.25 2,-8.5 11.25,-17.75 15.25,-17.75 v1(16.5,-19)
  Bottom Layer w0.25: v1(-16.2,6.5) v1@-4.667,18.033
SPI_DATA: P2.11 R1.1 R6.2 U1.2 | length 42.3
  Top Layer w0.25: R1.1 -18.025,-0.55 -18.025,-5.225 -19.775,-6.975 R6.2 -19.775,-17.225 -13.5,-23.5 v1(-13.5,-25.25)
  Bottom Layer w0.25: v1(-13.5,-25.25) -2.5,-25.25 -0.828,-26.922 -0.038,-26.922 P2.11
SPI_DATA_BUFF: P1.C2 pad.1 R1.2 R27.2 U1.18 | length 78.6
  Top Layer w0.125: v1(-17,7.5) -17,7.559 -15.3,9.259 pad.1
  Top Layer w0.25: R1.2 -18.1,1.2 -17.375,1.925 U1.18 -17.375,7.125 v1(-17,7.5) ; v1(-4.6,20.5) P1.C2 ; v1(14.25,-19) 14.25,-17.775
  Mid Layer 1 w0.25: v1@-4.667,20.433 v1(-4.6,20.5)
  Bottom Layer w0.125: v1(-17,7.5) -17,4 -16,3 -6,3 0.75,-3.75 0.75,-9 10.75,-19 v1(14.25,-19)
  Bottom Layer w0.25: v1(-17,7.5) -4.667,19.833 v1@-4.667,20.433
TX: P2.12 R4.1 R9.2 U1.7 | length 42.2
  Top Layer w0.25: R4.1 -14.737,-0.512 -14.737,-2.887 U1.7 -14.775,-4.475 -13.025,-6.225 R9.2 -13.025,-17.975 -10.5,-20.5 v1(-10.5,-31)
  Bottom Layer w0.25: v1(-10.5,-31) -3.5,-31 -2.074,-29.574 -1.344,-29.574 P2.12
TX_BUFF: P1.E1 R4.2 R29.2 U1.13 | length 56.4
  Top Layer w0.25: R29.2@-17.328,-29.922 v1(-16,-31.25) ; R4.2 v1(-14.7,1.2) -14.125,1.775 U1.13 -14.125,4.275 -7.2,11.2 -7.2,15.6 P1.E1
  Bottom Layer w0.125: v1(-16,-31.25) -17.5,-29.75 -17.5,-20 -15,-17.5 -15,0.9 v1(-14.7,1.2)
TX_OUT_N: P1.A5 P1.B5 R16.2 | length 7.7
  Top Layer w0.5: R16.2 3.45,30.975 3.45,26.439 P1.A5 P1.B5
TX_OUT_P: P1.A2 P1.B2 R13.2 | length 7.7
  Top Layer w0.5: P1.B2 -3.45,30.975 -3.05,31.375 -3.05,31.4 -3.025,31.425 R13.2
VDD_HS_extdiode_N: P1.A6 R18.1 | length 3.5
  Top Layer w0.45: P1.A6 R18.1
VDD_HS_extdiode_P: P1.A1 R17.1 | length 3.5
  Top Layer w0.45: R17.1 P1.A1
VDD_LS_N: C24.1 C25.1 C26.1 L2.2 P1.B4 | length 22.6
  Top Layer w0.5: P1.B4 2.373,22.727 16.563,22.727 18.11,21.18 18.11,19.82 C25.1 C26.1 L2.2
VDD_LS_P: C27.1 C28.1 C29.1 L3.2 P1.B3 | length 22.5
  Top Layer w0.5: L3.2 C27.1 C28.1 C29.1 -16.49,22.8 -2.3,22.8 P1.B3
pads on no net: D1.2 D2.2 U2.1

## Polygon pours and split planes (outlines as drawn)
GND on Top Layer "GND" (hatched 45Degree grid 0.5 track 0.2, remove dead copper, pour order 17): -27.5,42.5 27.5,42.5 27.5,-42.5 -27.5,-42.5
+50V on Top Layer "NONET_L-01_P-001" (hatched 45Degree grid 0.508 track 0.203, remove dead copper, pour order 11): -5.75,22.5 -5.75,17.5 -13.75,17.5 -13.75,22.5
+50V on Top Layer "NONET_L-01_P-001" (hatched 45Degree grid 0.508 track 0.203, remove dead copper, pour order 16): 5.75,22.5 5.75,17.5 13.75,17.5 13.75,22.5
+50V on Bottom Layer "NONET_L-01_P-001" (solid, remove dead copper, pour order 28): -11.75,21.25 cw(c-10.75,21.25) -10.75,22.25 -9.5,22.25 cw(c-9.5,21.25) -8.5,21.25 -8.5,19.75 cw(c-9.5,19.75) -9.5,18.75 -10.75,18.75 cw(c-10.75,19.75) -11.75,19.75
+50V on Bottom Layer "NONET_L-01_P-001" (solid, remove dead copper, pour order 27): 8.5,21.25 cw(c9.5,21.25) 9.5,22.25 10.75,22.25 cw(c10.75,21.25) 11.75,21.25 11.75,19.75 cw(c10.75,19.75) 10.75,18.75 9.5,18.75 cw(c9.5,19.75) 8.5,19.75
GND on Bottom Layer "NONET_L-01_P-001" (hatched 45Degree grid 0.5 track 0.2, remove dead copper, pour order 29): -27.5,42.5 27.5,42.5 27.5,-42.5 -27.5,-42.5
GND on Mid Layer 2 "NONET_L-01_P-001" (hatched 45Degree grid 0.5 track 0.2, remove dead copper, pour order 20): -27.5,42.5 27.5,42.5 27.5,-42.5 -27.5,-42.5
+50V on Mid Layer 2 "NONET_L-01_P-001" (solid, remove dead copper, pour order 9): -11.75,21.25 cw(c-10.75,21.25) -10.75,22.25 -9.5,22.25 cw(c-9.5,21.25) -8.5,21.25 -8.5,19.75 cw(c-9.5,19.75) -9.5,18.75 -10.75,18.75 cw(c-10.75,19.75) -11.75,19.75
+50V on Mid Layer 2 "NONET_L-01_P-001" (solid, remove dead copper, pour order 19): 8.5,21.25 cw(c9.5,21.25) 9.5,22.25 10.75,22.25 cw(c10.75,21.25) 11.75,21.25 11.75,19.75 cw(c10.75,19.75) 10.75,18.75 9.5,18.75 cw(c9.5,19.75) 8.5,19.75
GND on Mid Layer 1 "NONET_L-01_P-001" (hatched 45Degree grid 0.5 track 0.2, remove dead copper, pour order 10): -27.5,42.5 27.5,42.5 27.5,-42.5 -27.5,-42.5

## Other copper
Top Layer:
  pour cut-out: -17.5,-15 -17.5,-16 -15.25,-16 -15.25,-15
  pour cut-out: -3.45,26.25 -3.45,37 -5,38.25 -5,40 4.925,40 4.925,38.175 3.45,37 3.45,26.25
  pour cut-out: 18.2,21.7 18.2,23.3 18,23.3 18,21.7
  pour cut-out: -18.2,23.3 -18.2,21.7 -17.4,21.7 -17.4,23.3
  pour cut-out: -5.75,17.05 -5.75,22.75 -2.35,22.75 -3.45,21.65 -3.45,17.05
  pour cut-out: 5.75,14.75 -5.75,14.75 -5.75,17.05 -1.15,17.05 1.15,17.05 5.75,17.05
  pour cut-out: -5.75,26.25 5.75,26.25 5.75,22.75 5.7,22.8 2.3,22.8 1.15,23.95 -1.15,23.95 -2.35,22.75 -5.75,22.75
  pour cut-out: 12.55,24 13.45,25 13.45,26.25 7.5,26.25 7.5,24
  pour cut-out: -13.45,25 -13.45,26.25 -7.5,26.25 -7.5,25
Mid Layer 1:
  pour cut-out: 1.27,-34.58 -1.27,-34.58 -3.81,-32.04 -3.81,-26.96 -1.27,-24.42 1.27,-24.42 3.81,-29.5 1.27,-29.5 0,-32.04
Bottom Layer:
  pour cut-out: -17,7.5 -18,8.5 -17.75,8.75 -17,8
  pour cut-out: -0.5,21.75 -0.5,24.25 0.5,24.25 0.5,21.75
  pour cut-out: -1.27,-24.42 -2.1,-25.25 -13.25,-25.25 -11.5,-27 -12.5,-28 -12.5,-28.25 -10.75,-28.25 -9.5,-29.5 -10.5,-30.5 -10.5,-33.5 -10,-34 -1.85,-34 -1.27,-34.58 1.27,-34.58 1.27,-33.31 0,-32.04 1.27,-30.77 1.27,-29.5
  pour cut-out: 14.25,-19 18.75,-19 18.25,-18.5 13.75,-18.5
  pour cut-out: -17,7.5 -15.4,5.5 -5.027,15.873 -4.627,15.873 -4.6,15.9 -4.667,15.967 -4.667,19.833

## Silkscreen, mask and mechanical layers (free items; w line width, h text height)
Top Overlay:
  lines w0.1: -17.5,-24.25 -17.5,-23.25 ; -15.25,-24.25 -15.25,-23.25 ; 14.25,-24 14.25,-23 ; 14.25,-11.75 14.25,-10.75 ; 16.5,-24 16.5,-23 ; 16.5,-11.75 16.5,-10.75 ; 18.75,-24 18.75,-23 ; 18.75,-11.75 18.75,-10.75
  text "DATA" at -14.174,9.893 h1 r45
  text "FREF" at -2.324,8.643 h1 r45
  text "CLK" at -13.374,8.593 h1 r45
  text "CS" at -12.574,7.293 h1 r45
  text "+3V3" at 18.594,4.814 h1 r45
  text "DATA" at 14.25,-10.281 h1 r45
  text "CLK" at 16.5,-10.281 h1 r45
  text "CS" at 18.75,-10.281 h1 r45
  text "SPI" at 21.5,-15.281 h1 r45
  text "TX" at -17.5,-22.781 h1 r45
  text "RX" at -15.25,-22.781 h1 r45
  text "+50V" at 14.25,-23.031 h1 r45
  text "+5V" at 16.5,-23.031 h1 r45
  text "+3V3" at 18.75,-23.031 h1 r45
  text "PWR" at 21.5,-27.531 h1 r45
  text "TRX" at -21.75,-27.781 h1 r45
  text "JLCJLCJLCJLC" at -4.665,-38.4 h0.8
Bottom Overlay:
  drawing of 16 lines, arcs and shapes, not listed
  text "NMR Frontend V1.4 / 10/2023 / T. Wirth" at 11.621,29.036 h1
  text "DATA" at 1.833,-22.095 h1
  text "I-" at 2.655,-23.595 h1
  text "I+" at -2.25,-23.75 h1
  text "CS" at -3.655,-25.845 h1
  text "Q+" at 4.345,-25.845 h1
  text "RX" at -5.155,-28.345 h1
  text "Q-" at 6.095,-28.345 h1
  text "TX" at -4.905,-31.345 h1
  text "CLK" at 7.595,-31.345 h1
  text "FREF" at -2.417,-34.095 h1
  text "GND" at 5.083,-34.095 h1
  text "+50V" at -0.805,-36.595 h1
  text "+50V" at 4.445,-36.595 h1
  text "+5V/+3V3" at 3.832,-38.595 h1
Outline:
  lines w0.05: -25,-37.5 -22.5,-40 22.5,-40 25,-37.5 25,37.5 22.5,40 20,40 -20,40 -22.5,40 -25,37.5 -25,-37.5